# EAGLE board power (EAGLE 5.02)
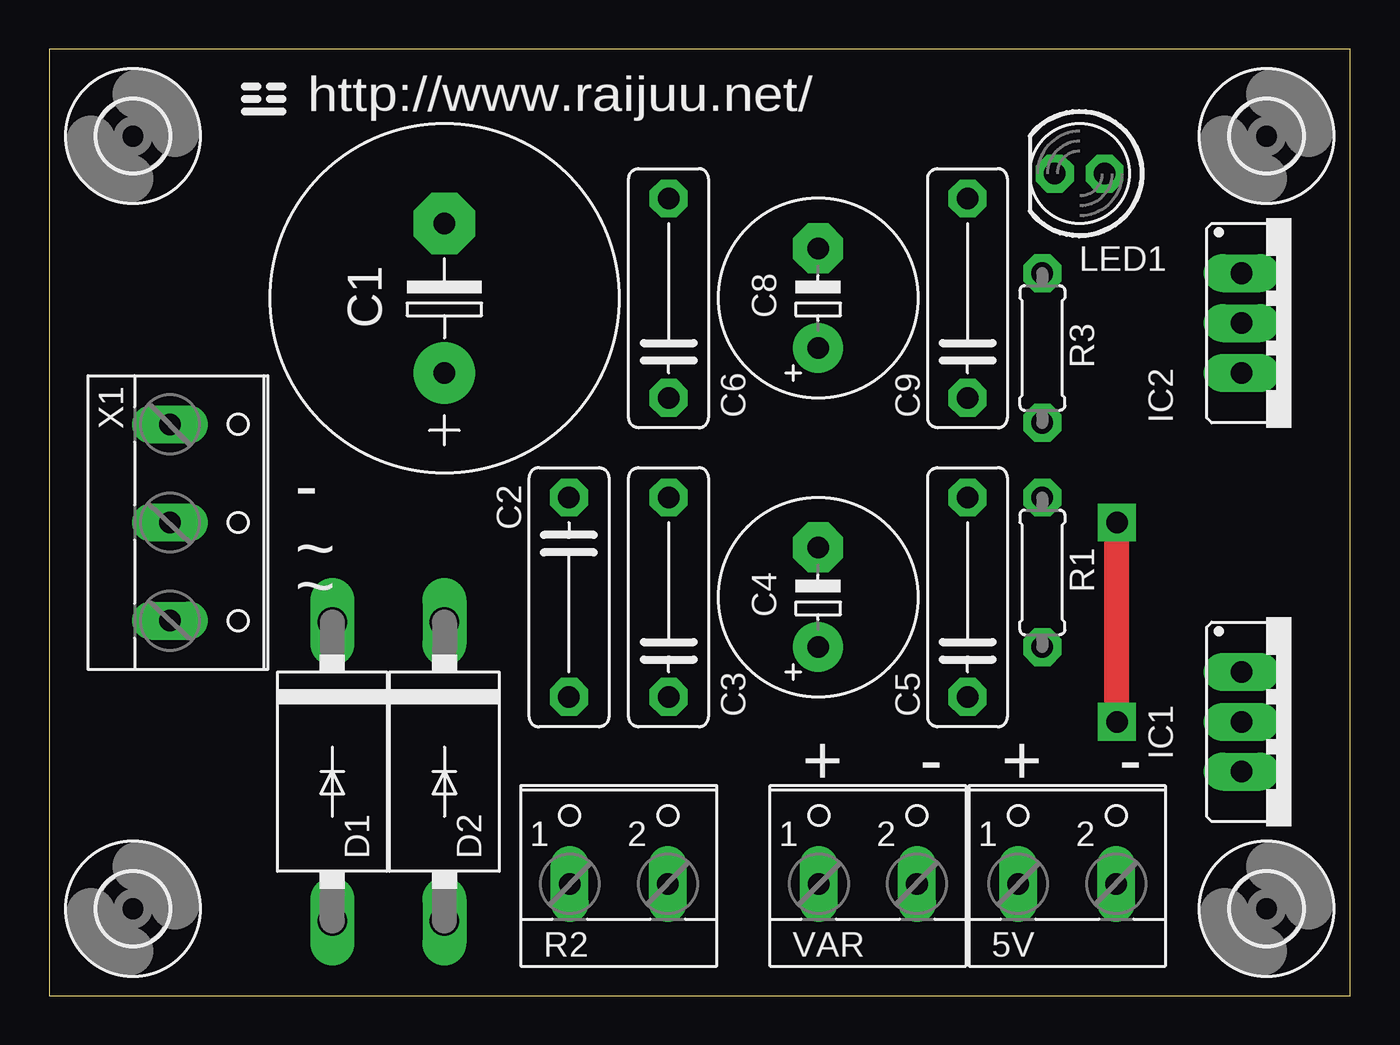
[diagram p0: board, top side]
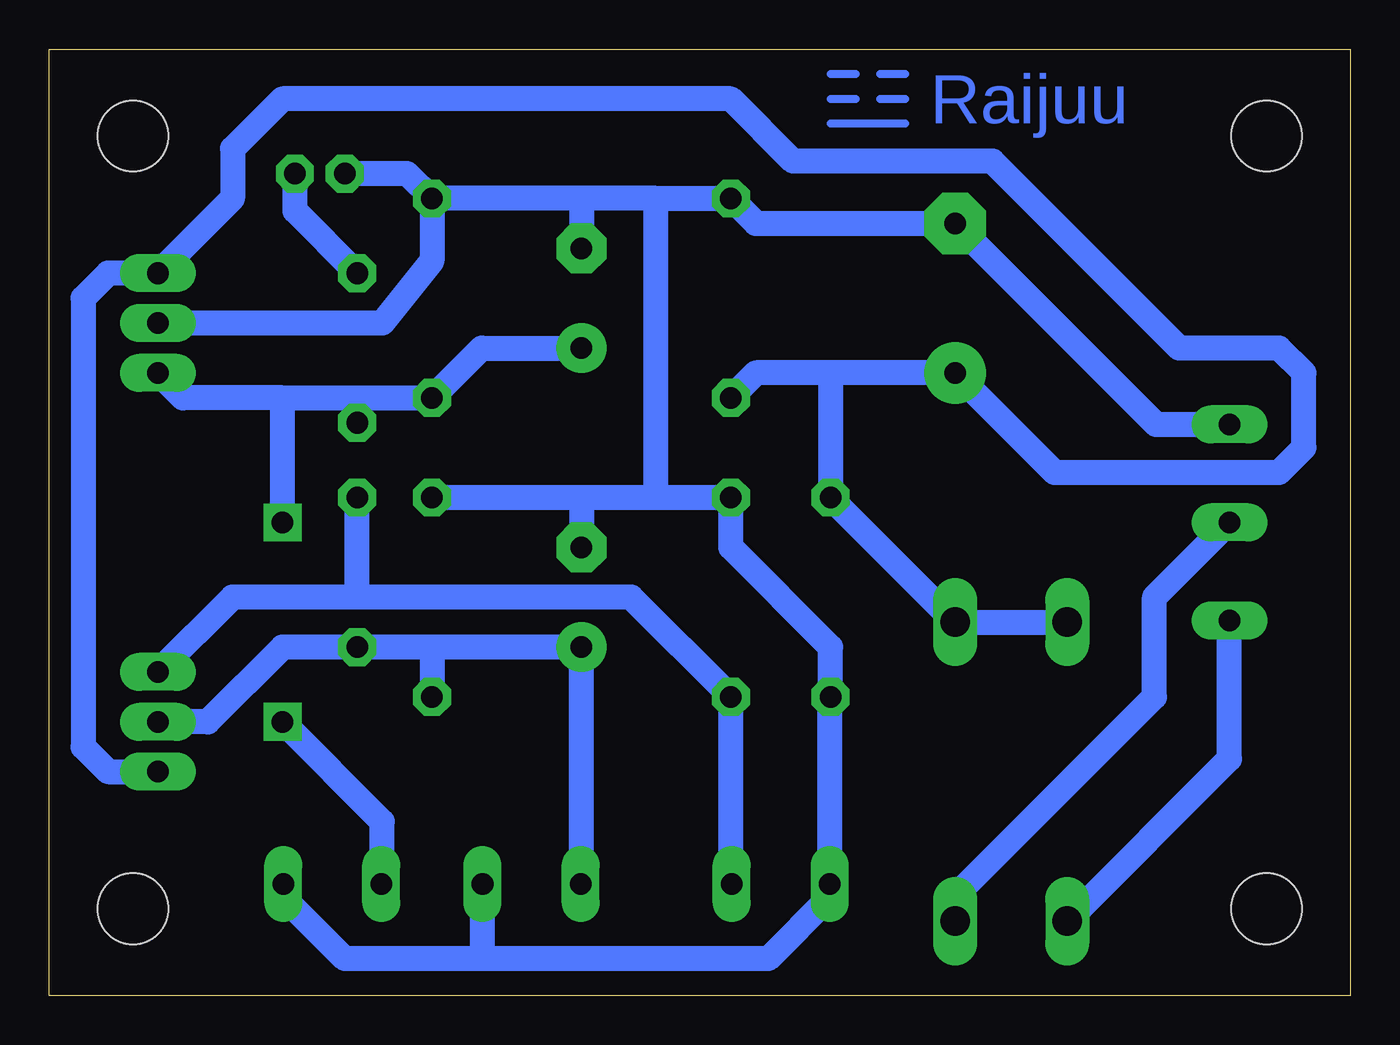
[diagram p1: board, bottom side, seen from below]

Size 66.34 x 48.25 mm. Coordinates in mm from the lower left corner, seen from the top.
Outline: 0,0 66.34,0 66.34,48.25 0,48.25 0,0
Copper layers (1*16): Top 0.035mm / dielectric 1.5mm / Bottom 0.035mm
Design rules "default": minimum track width 10mil, minimum drill 24mil, track to track 8mil, track to pad 8mil, pad to pad 8mil, via to via 8mil, smd to smd 8mil, copper to edge 40mil, drill to drill 8mil, minimum pad ring 10mil, minimum via ring 8mil, stop-mask expansion 4mil, vias tented up to drill 0mil, thermal gap 10mil

## Footprints (pad centres in the part's own frame; a part is rotated, then mirrored left to right if it is on the bottom)
W237-102 = drill 1.1 pad 1.93 long: 1 -2.5,-1.27; 2 2.5,-1.27
E7,5-18 = drill 1.1 pad 3.15 round: + -3.81,0 | drill 1.1 pad 3.15 octagon: - 3.81,0
C102-043X133 = drill 1.1 pad 1.93 octagon: 1 -5.08,0; 2 5.08,0
E5-10,5 = drill 1.1 pad 2.54 round: + -2.54,0 | drill 1.1 pad 2.54 octagon: - 2.54,0
DO201-15 = drill 1.5 long: A 7.62,0; C -7.62,0
317TS = drill 1.1 pad 1.93 long: 1 -2.54,-2.54; 2 0,-2.54; 3 2.54,-2.54
78XXS = drill 1.1 pad 1.93 long: GND 0,-2.54; IN -2.54,-2.54; OUT 2.54,-2.54
LED5MM = drill 1.1 pad 1.93 octagon: A -1.27,0; K 1.27,0
0207/7 = drill 1.1 pad 1.93 octagon: 1 -3.81,0; 2 3.81,0
3,6 = hole 3.6: 0,0
W237-103 = drill 1.1 pad 1.93 long: 1 -5,-1.29; 2 0,-1.29; 3 5,-1.29

## Placement (x,y rotation side)
5V  [W237-102]  51.91,6.98 0 top
C1  4700uF  [E7,5-18]  20.16,35.55 90 top
C2  100nF  [C102-043X133]  26.51,20.32 270 top
C3  100nF  [C102-043X133]  31.59,20.32 90 top
C4  220uF  [E5-10,5]  39.2,20.32 90 top
C5  100nF  [C102-043X133]  46.83,20.32 90 top
C6  100nF/250V  [C102-043X133]  31.59,35.55 90 top
C8  220uF  [E5-10,5]  39.2,35.55 90 top
C9  100nF  [C102-043X133]  46.83,35.55 90 top
D1  1N5408  [DO201-15]  14.44,11.42 270 top
D2  1N5408  [DO201-15]  20.16,11.42 270 top
IC1  LM317  [317TS]  63.34,13.96 270 top
IC2  LM7805  [78XXS]  63.34,34.28 270 top
LED1  [LED5MM]  52.54,41.9 180 top
R1  330  [0207/7]  50.63,21.59 270 top
R2  [W237-102]  29.05,6.98 0 top
R3  330  [0207/7]  50.63,33.02 270 top
U$1  [3,6]  4.28,4.44 0 top
U$2  [3,6]  62.06,4.44 0 top
U$3  [3,6]  62.06,43.81 0 top
U$4  [3,6]  4.28,43.81 0 top
U$5  [LOGO-COPPER]  22.7,44.45 0 top
U$6  [LOGO-SMALL]  10,45.08 0 top
VAR  [W237-102]  41.74,6.98 0 top
X1  [W237-103]  7.46,24.12 270 top

## Library data of the parts
5V C1-C6 C8 C9 D1 D2 IC1 IC2 LED1 R1-R3 VAR X1 = power
U$1-U$4 = fonte_variavel
U$5 U$6 = logo

## Nets
GND: 5V.2 C1.- C2.2 C3.2 C4.- C5.2 C6.2 C8.- C9.2 IC2.GND LED1.K R2.1 VAR.2 X1.1
N$1: D1.A X1.3
N$2: D2.A X1.2
N$3: LED1.A R3.1
N$5: C4.+ C5.1 IC1.2 R1.2 VAR.1
N$6: C3.1 IC1.1 R1.1 R2.2
N$8: C1.+ C2.1 C6.1 D1.C D2.C IC1.3 IC2.IN
N$10: 5V.1 C8.+ C9.1 IC2.OUT R3.2

## Tracks (layer width: path | path; a pad name or v marks a point on that pad's centre or on a via)
GND
  Bottom 1.27: X1.1 9.92,29.12 C1.- 30.32,39.36 C6.2 35.4,40.63 | 35.4,40.63 39.2,40.63 | 39.2,40.63 C9.2 | 39.2,40.63 C8.- | 35.4,25.39 C3.2 31.59,22.86 26.51,17.78 C2.2 26.55,15.19 R2.1 26.51,6.34 26.51,5.08 29.68,1.9 44.29,1.9 | 35.4,25.39 39.2,25.39 | 39.2,25.39 C5.2 | 39.2,25.39 C4.- | 35.4,40.63 C9.2 | 35.4,25.39 35.4,40.63 | 5V.2 54.41,5.04 51.27,1.9 44.29,1.9 | VAR.2 44.24,2.58 44.29,1.9 | IC2.GND 49.37,34.28 46.83,37.46 C9.2 | LED1.K 48.09,41.9 C9.2
N$1
  Bottom 1.27: X1.3 6.17,12.08 D1.A
N$2
  Bottom 1.27: X1.2 6.18,24.12 10,20.32 10,15.23 20.16,5.08 D2.A
N$3
  Bottom 1.27: LED1.A 53.81,40 R3.1
N$5
  Bottom 1.27: VAR.1 39.2,6.34 C4.+ 46.83,17.78 | 46.83,17.78 R1.2 54.45,17.78 58.26,13.96 IC1.2 | 46.83,17.78 C5.1
N$6
  Bottom 1.27: R2.2 31.59,6.34 C3.1 36.66,20.32 50.63,20.32 | 50.63,20.32 56.98,20.32 IC1.1 | 50.63,20.32 R1.1
N$8
  Bottom 1.27: D1.C D2.C C2.1 26.51,31.75 | 26.51,31.75 C1.+ 15.08,26.67 3.65,26.67 2.38,27.94 2.38,31.75 3.65,33.02 8.73,33.02 18.25,42.54 28.41,42.54 31.59,45.71 54.45,45.71 56.98,43.17 56.98,40.63 IC2.IN 63.34,36.82 64.6,35.55 64.6,12.69 63.34,11.42 IC1.3 | 26.51,31.75 30.32,31.75 C6.1
N$10  (via drill 1.1 pad 1.93)
  Top 1.27: v54.45,13.96 v54.45,24.12
  Bottom 1.27: C8.+ 44.29,33.02 C9.1 50.63,30.48 | 50.63,30.48 R3.2 | 54.45,30.48 50.63,30.48 | 54.45,30.48 59.52,30.48 IC2.OUT | v54.45,13.96 49.37,8.88 49.37,5.71 5V.1 | v54.45,24.12 54.45,30.48

## Text on the board
Bottom: Raijuu
tPlace: http://www.raijuu.net/ | - | ~ | ~ | + | - | + | -